# Altium PCB RightBar2_PcbDoc.PcbDoc
Units mil, origin at the board's own origin, x right, y up, seen from the top; angles counter-clockwise.
Board outline 12625 x 1400 mil, 2 copper layers (Top Layer, Bottom Layer); 8 components, 10 nets, 60 pads, 12 vias.
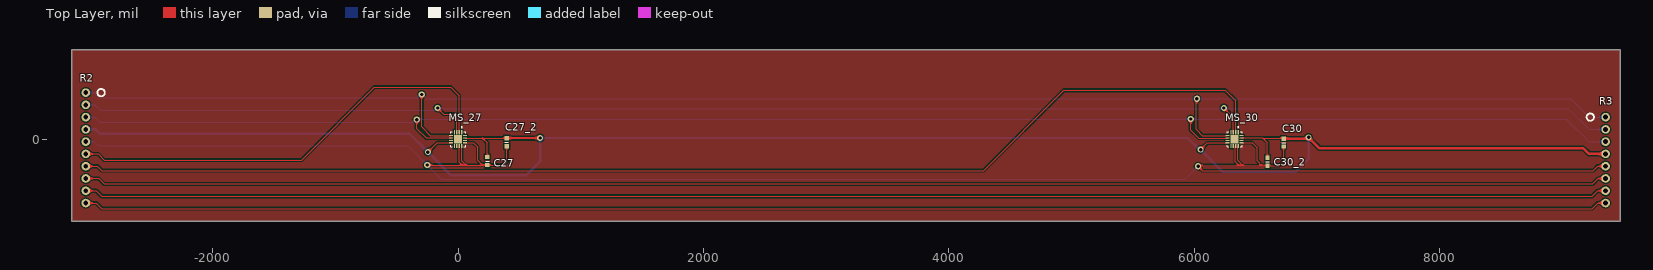
[diagram p0: Top Layer view]
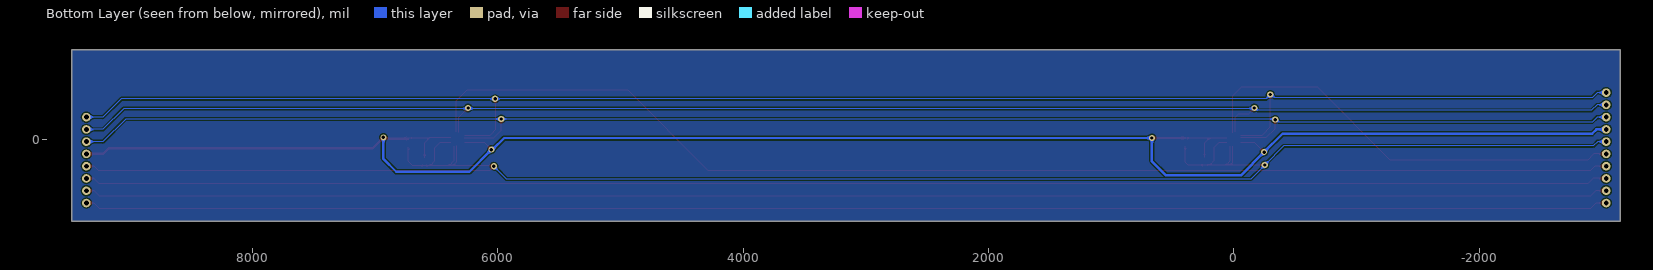
[diagram p1: Bottom Layer view, seen from below]
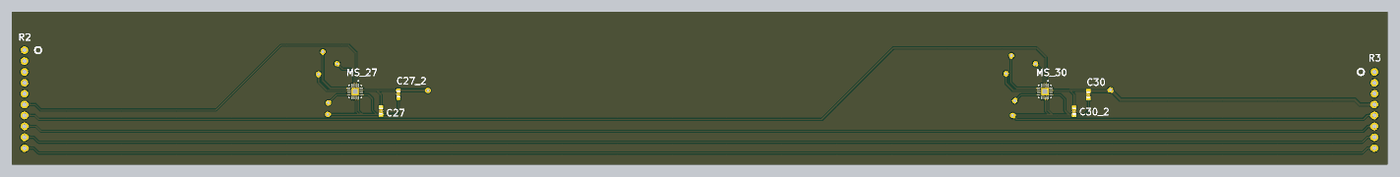
[diagram p2: 3D render of the assembled board from above, using the file's embedded part models]

## Layer stack, top to bottom
Top Solder: solder mask 0.4, Solder Resist, Dk 3.5
Top Layer: signal copper 1.4
Dielectric 1: dielectric 12.6, FR-4, Dk 4.8
Bottom Layer: signal copper 1.4
Bottom Solder: solder mask 0.4, Solder Resist, Dk 3.5

## Board outline
-3150,-670 -3150,730 9475,730 9475,-670

## Design rules (kind name [scope] priority, off if disabled: settings)
Clearance [All] p1: gap=10 ignorepadtopadclearanceinfootprint=FALSE except(0: Arc-Hole Track-Hole SMDPad-Hole THPad-Hole Via-Hole Fill-Hole Poly-Hole Region-Hole Text-Hole)
PolygonConnect [All] p1: connectstyle=Relief reliefconductorwidth=10 reliefentries=4 polygonreliefangle="90 Angle" airgapwidth=10
RoutingVias [All] p1: holewidth=28 width=50 viastyle="Through Hole" minholewidth=28 minwidth=50 maxholewidth=28 maxwidth=50
SolderMaskExpansion [All] p1: expansion=4 istentingtop=FALSE
Width [All] p1: maxlimit=10 minlimit=10 preferedwidth=10
30 further rules are at their usual default settings.

## Components (designator, comment, footprint, x,y, rotation, side; value= is the part's Value field where it differs from the comment)
C27 "0.1uF" CAP_0603 238.5,-177.66 r90 top
C27_2 "0.1uF" CAP_0603 396,-25.16 r270 top
C30 "0.1uF" CAP_0603 6730,-27.5 r90 top
C30_2 "0.1uF" CAP_0603 6598.5,-182.66 r270 top
MS_27 "MLX90393SLW ABA 011 RE" MLX90393 0,0 r270 top
MS_30 "MLX90393SLW ABA 011 RE" MLX90393 6330,0 r270 top
R2 "PIN_right" PIN_RIGHT_2 -3035,-120 r0 top (schematic designator CON_R_2)
R3 "PIN_right" PIN_RIGHT_3 9355,-320 r0 top (schematic designator CON_R_3)

## Footprints (in the part's own frame and the unit in brackets; to place one, negate y for a bottom-side part, rotate by r counter-clockwise, add the part's x,y. Pads: shape width x height; smd on the part's side, far side on the other; paste and mask are expansions set on the pad)
CAP_0603 [mil]
  rect 35x35 smd: 1(-32.5,0) 2(32.5,0)
  silkscreen extent 0,-16 0,14, body extent -53,-18 49,21, height 35
MLX90393 [mm]
  rrect25% 0.86x0.26 smd: 1(-1.435,0.75) 2(-1.435,0.25) 3(-1.435,-0.25) 4(-1.435,-0.75) 9(1.435,-0.75) 10(1.435,-0.25) 11(1.435,0.25) 12(1.435,0.75)
  rrect25% 0.26x0.86 smd: 5(-0.75,-1.435) 6(-0.25,-1.435) 7(0.25,-1.435) 8(0.75,-1.435) 13(0.75,1.435) 14(0.25,1.435) 15(-0.25,1.435) 16(-0.75,1.435)
  rect 1.71x1.71 smd paste-2: 17(0,0)
  silkscreen extent -2.59,-1.55 1.55,1.55
PIN_RIGHT_2 [mil]
  round 70 hole 40: 1(0,500) 2(0,400) 3(0,300) 4(0,200) 5(0,100) 6(0,0) 7(0,-100) 8(0,-200) 9(0,-300) 10(0,-400)
  silkscreen extent 95,470 155,530
PIN_RIGHT_3 [mil]
  round 70 hole 40: 1(0,500) 2(0,400) 3(0,300) 4(0,200) 5(0,100) 6(0,0) 7(0,-100) 8(0,-200)
  silkscreen extent -155,470 -95,530

## Part data
C27 C27_2 C30 C30_2: library part CAP, "Capacitance"
MS_27 MS_30: "MLX90393 Sensor"
R2: library part PIN_right_2
R3: library part PIN_right_3

## Via types
v1: diameter 50, hole 28, Top Layer to Bottom Layer, 12 vias

## Nets (pads, with @x,y where several pads share a name; then routed paths per layer and width w, separated by ;. In a path a pad name is that pad's centre, name@x,y a point inside that pad or via, vN(x,y) a via of type N, cw(c..) or ccw(c..) an arc to the next point about the centre after c; other vN are vias at no path point)
7: R2.9 R3.7 | length 12427.3
  Top Layer w10: R2.9 -2950,-420 -2905,-465 9245,-465 9290,-420 R3.7
11: R2.8 R3.6 | length 12427.3
  Top Layer w10: R2.8 -2930,-320 -2885,-365 9250,-365 9295,-320 R3.6
15: R2.10 R3.8 | length 12427.3
  Top Layer w10: R2.10 -2950,-520 -2905,-565 9245,-565 9290,-520 R3.8
27: MS_27.2 R2.6 | length 3639.7
  Top Layer w10: R2.6 -2935,-120 -2885,-170 -1276.34,-170 -681.34,425 -61.65,425 8.5,354.84 MS_27.2@8.5,54.84
30: MS_30.2 R2.7 | length 9953.4
  Top Layer w10: R2.7 -2940,-220 -2905,-255 4283.66,-255 4938.5,399.84 6253.5,399.84 6339.84,313.5 MS_30.2
GND: C27.1 C27_2.2 C30.1 C30_2.2 MS_27.11 MS_27.12 MS_27.13 MS_30.11 MS_30.12 MS_30.13 R2.5 R3.5 | length 15479.4
  Top Layer w10: v1(-251.5,-210.16) 33.5,-210.16 ; MS_27.11 9.84,-186.5 33.5,-210.16 ; MS_27.12 29.53,-176.18 63.5,-210.16 ; MS_27.13 57.13,-30.16 123.5,-30.16 158.5,-65.16 158.5,-170.16 198.5,-210.16 ; C27_2.2 396,-187.66 373.5,-210.16 C27.1 198.5,-210.16 ; MS_30.11@6336.85,-52.13 6336.85,-56.5 6336.85,-183.5 6368.5,-215.16 ; MS_30.12@6356.54,-52.13 6356.54,-56.5 6356.54,-173.19 6398.5,-215.16 ; MS_30.13 6472.87,-29.53 6513.5,-70.16 6513.5,-175.16 6553.5,-215.16 ; C30.1 6730,-178.66 6693.5,-215.16 C30_2.2 6553.5,-215.16 ; R3.5 9290,-220 9255,-255 6068.35,-255 v1(6033.5,-220.16) 6038.5,-215.16 6368.5,-215.16 ; 33.5,-210.16 63.5,-210.16 ; 63.5,-210.16 198.5,-210.16 ; 6368.5,-215.16 6398.5,-215.16 ; 6398.5,-215.16 6553.5,-215.16
  Bottom Layer w10: R2.5 -2965,-20 -2930,-55 -406.65,-55 v1(-251.5,-210.16) -136.65,-325 5928.66,-325 v1(6033.5,-220.16)
MISO: MS_27.6 MS_30.6 R2.3 R3.3 | length 13293.6
  Top Layer w10: v1(-336.5,160) -336.5,86.56 -260.21,10.28 MS_27.6@-56.5,10.28 ; v1(5973.5,164.84) 5973.5,74.84 6038.94,9.41 MS_30.6@6273.5,9.41
  Bottom Layer w10: R2.3 -2960,180 -2920,140 -367.32,140 -347.32,160 v1(-336.5,160) ; v1@-336.5,164.84 v1(5973.5,164.84) 9035.16,164.84 9220,-20 R3.3
MOSI: MS_27.5 MS_30.5 R2.1 R3.1 | length 13550.9
  Top Layer w10: v1(-296.5,364.84) -296.5,99.84 -226.93,30.28 MS_27.5@-56.5,30.28 ; v1(6023.5,329.84) 6018.5,324.84 6018.5,79.84 6068.35,30 MS_30.5@6269.35,30
  Bottom Layer w10: R2.1 -2960,380 -2920,340 -332.16,340 -307.32,364.84 v1(-296.5,364.84) -261.5,329.84 v1(6023.5,329.84) 6023.58,329.92 9070.08,329.92 9220,180 R3.1
SCL: MS_27.3 MS_30.3 R2.2 R3.2 | length 13033.3
  Top Layer w10: v1(-166.5,254.84) -116.5,204.84 -36.5,204.84 -10.28,178.62 MS_27.3@-10.28,56.5 ; v1(6243.5,254.84) 6320.16,178.19 MS_30.3
  Bottom Layer w10: R2.2 -2960,280 -2915,235 -197.16,235 -177.32,254.84 v1(-166.5,254.84) -161.65,250 6238.66,250 v1(6243.5,254.84) 6248.35,250 9050,250 9220,80 R3.2
VCC: C27.2 C27_2.1 C30.2 C30_2.1 MS_27.8 MS_27.15 MS_30.8 MS_30.15 R2.4 R3.4 | length 15147.3
  Top Layer w10: v1(-246.5,-105.16) -170.87,-29.53 MS_27.8 ; MS_27.15 198.5,9.84 ; C27.2 238.5,-30.16 198.5,9.84 ; C27_2.1@398.5,9.84 C27_2.1 393.5,9.84 198.5,9.84 ; v1(6053.5,-85.16) 6108.66,-30 MS_30.8@6270.59,-30 ; MS_30.15@6386.5,10.28 6559.8,10.28 6560.08,10 ; C30_2.1 6598.5,-28.42 6560.08,10 ; C30.2 6725,10 6560.08,10 ; v1@6912.84,5 6922.68,14.84 v1(6933.5,14.84)
  Top Layer w20: C27_2.1@398.5,9.84 v1(668.5,9.84) ; C30.2 v1@6912.84,5 ; v1(6933.5,14.84) 7023.35,-75 9175,-75 9220,-120 R3.4
  Bottom Layer w10: v1@6043.5,-85.16 v1(6053.5,-85.16)
  Bottom Layer w20: R2.4 -2955,80 -2920,45 -396.65,45 v1(-246.5,-105.16) -56.65,-295 553.66,-295 668.5,-180.16 v1(668.5,9.84) 5948.5,9.84 v1@6043.5,-85.16 ; v1(6053.5,-85.16) 6233.35,-265 6828.66,-265 6933.5,-160.16 v1(6933.5,14.84)
pads on no net: MS_27.1 MS_27.4 MS_27.7 MS_27.9 MS_27.10 MS_27.14 MS_27.16 MS_27.17 MS_30.1 MS_30.4 MS_30.7 MS_30.9 MS_30.10 MS_30.14 MS_30.16 MS_30.17

## Polygon pours and split planes (outlines as drawn)
no net on Top Layer "NONET_L01_P012" (solid, pour order 12): -3150,730 -3150,-670 9475,-670 9475,730
no net on Top Layer "NONET_L01_P007" (solid, pour order 7): -3150,670
no net on Top Layer "NONET_L01_P003" (solid, pour order 3): -3145,665
no net on Top Layer "NONET_L01_P000" (solid, pour order 0): -3145,665
no net on Bottom Layer "NONET_L02_P011" (solid, pour order 11): -3150,730 -3150,-670 9475,-670 9475,730

## Silkscreen, mask and mechanical layers (free items; w line width, h text height)
Mechanical 1:
  lines w10: -3150,-670 -3150,730 9475,730 9475,-195 9475,-670 -3150,-670